# EAGLE board pcb_sebi_tsc (EAGLE 9.7.0)
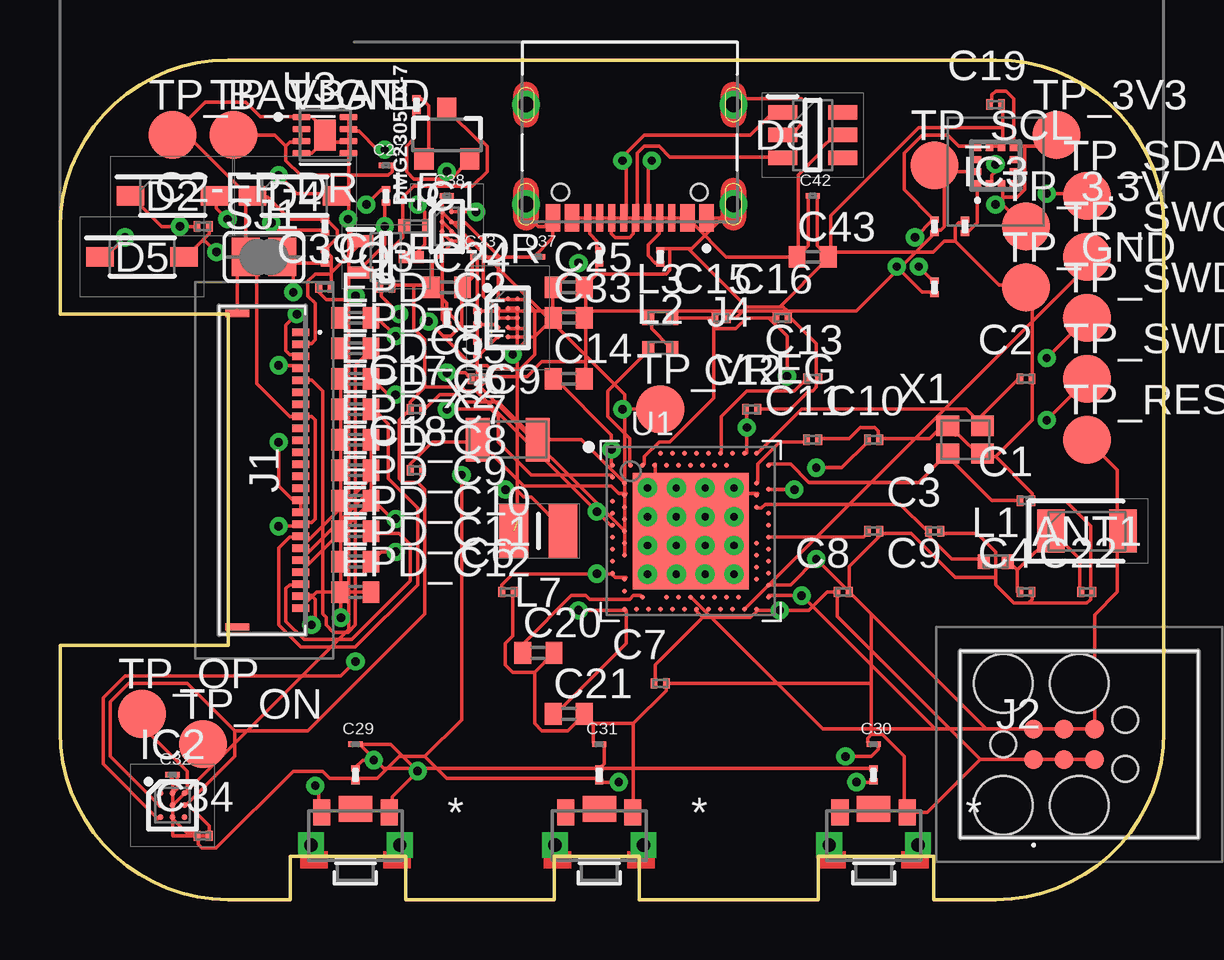
[diagram p0: board, top side]
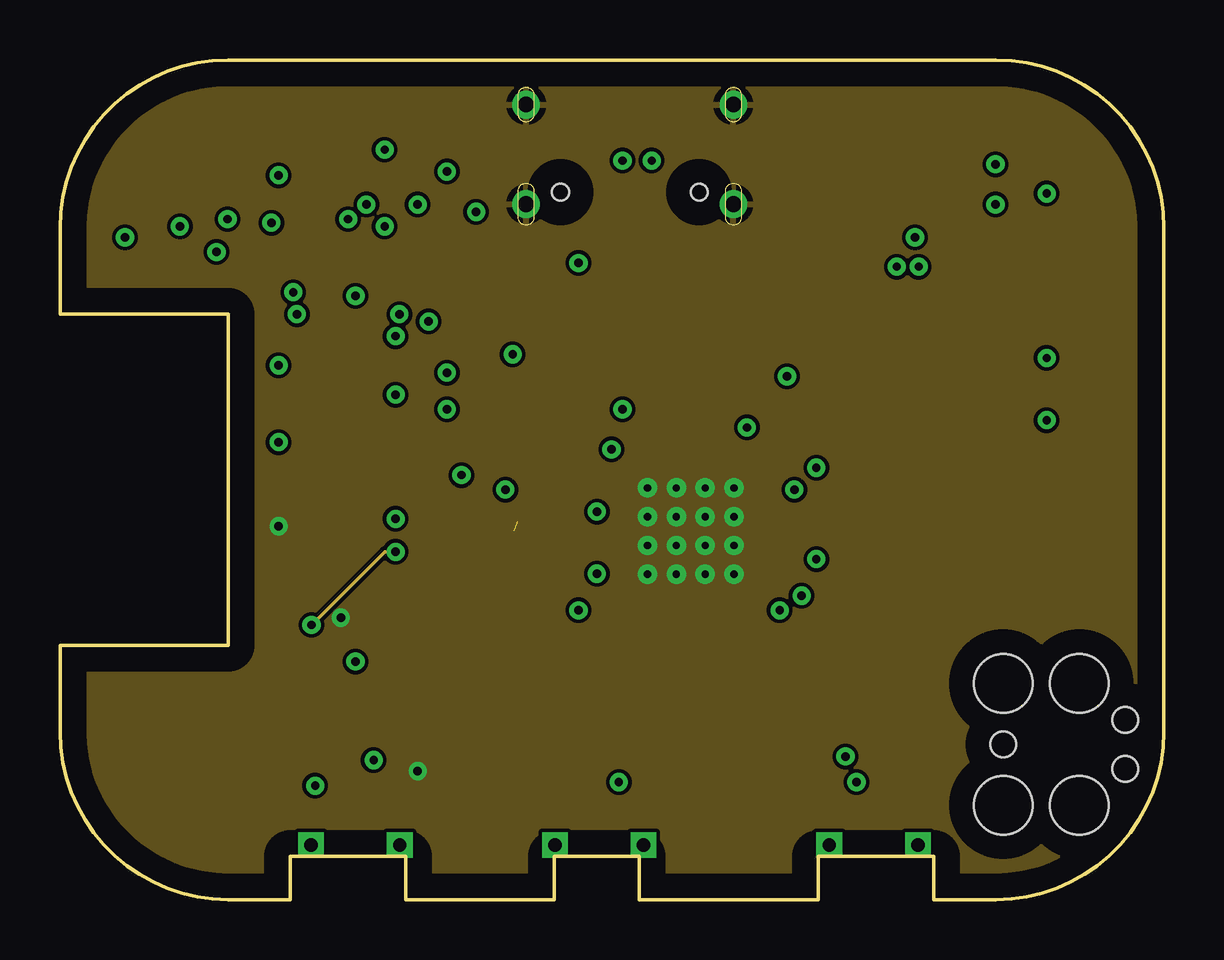
[diagram p1: board, inner layer Route2]
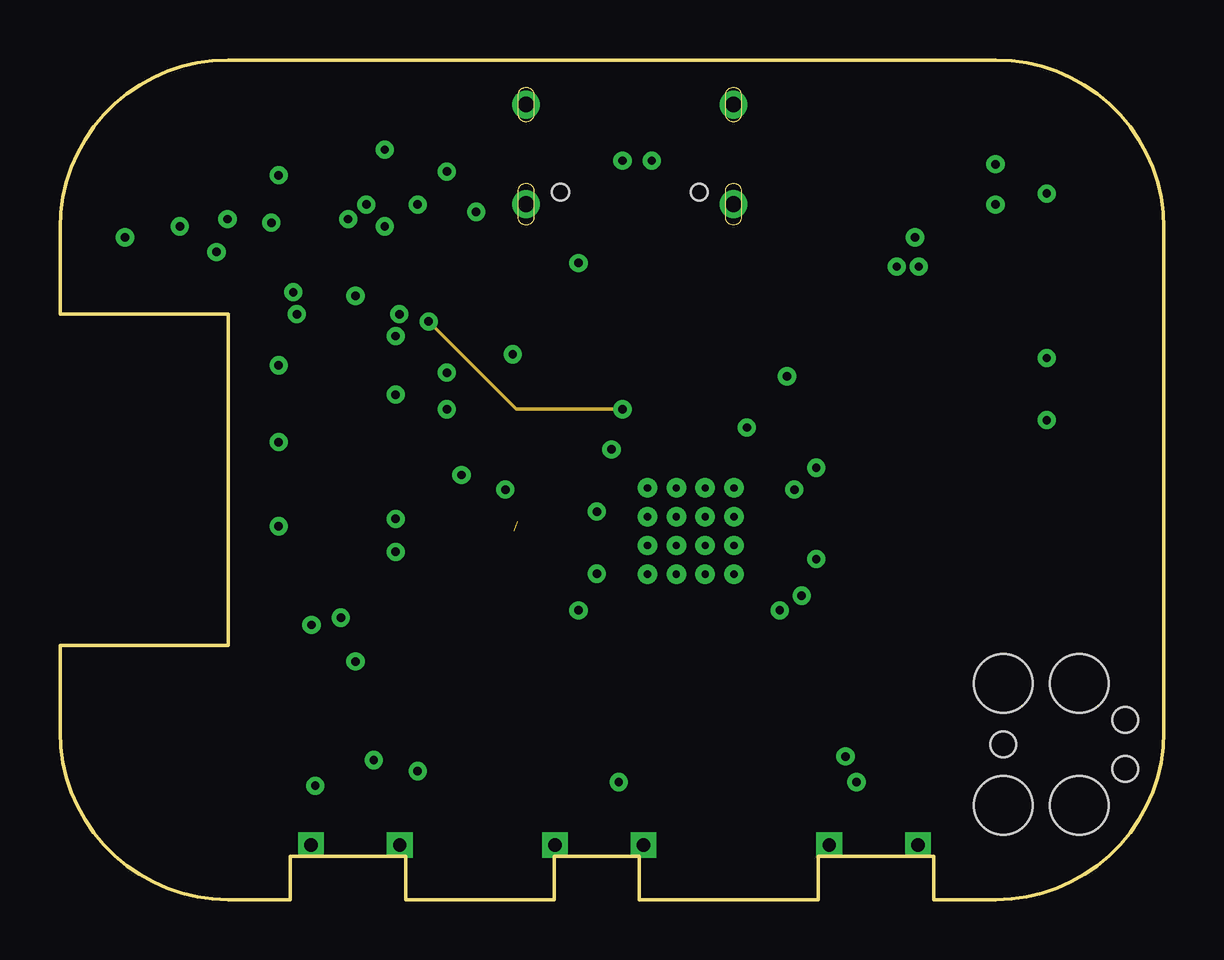
[diagram p2: board, inner layer Route15]
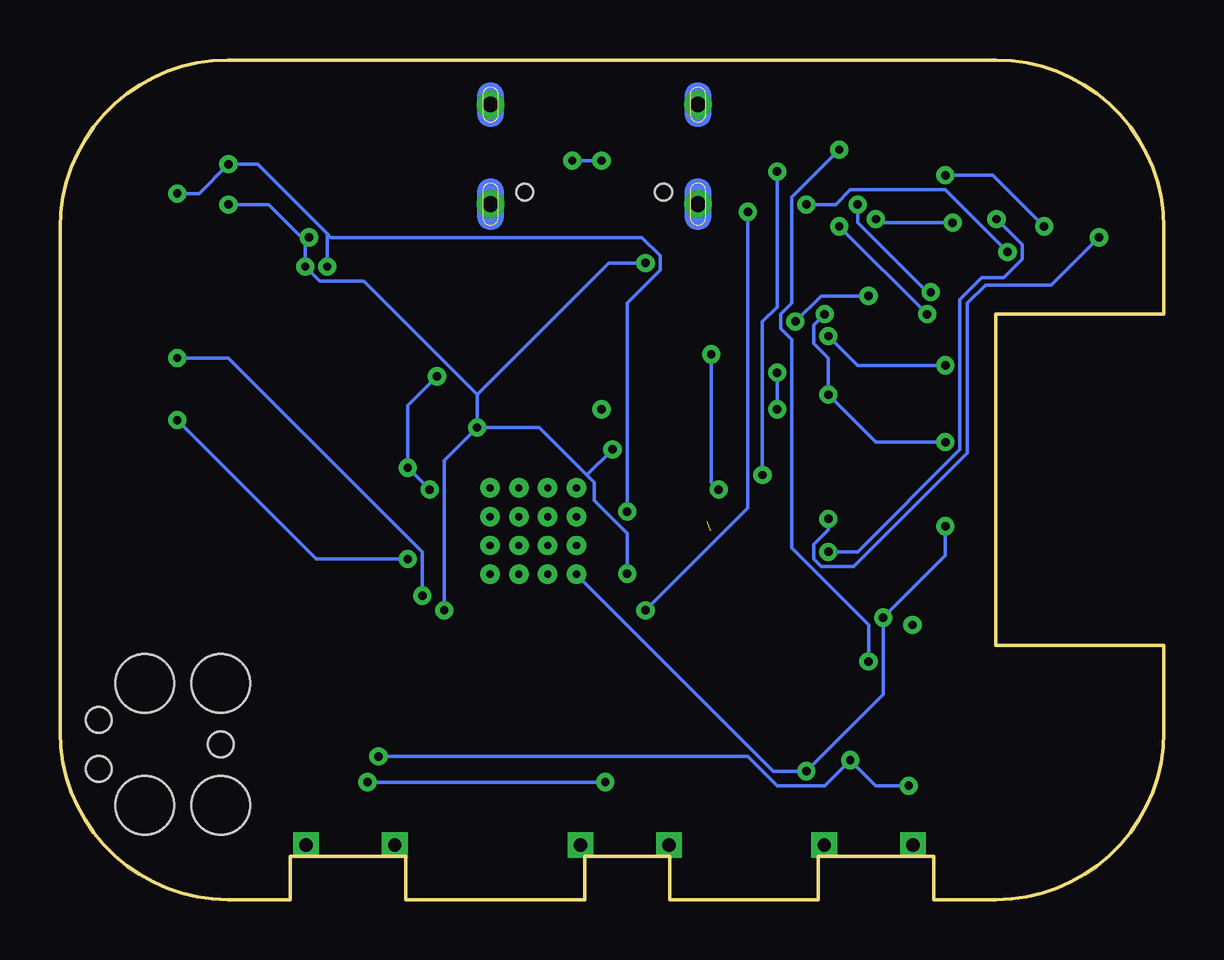
[diagram p3: board, bottom side, seen from below]

Size 46 x 35 mm. Coordinates in mm from the lower left corner, seen from the top.
Outline: 39,0 36.4,0 36.4,1.8 31.6,1.8 31.6,0 24.13,0 24.13,1.8 20.6,1.8 20.6,0 14.4,0 14.4,1.8 9.6,1.8 9.6,0 7,0 arc-90 0,7 0,10.6 7,10.6 7,24.4 0,24.4 0,28 arc-90 7,35 39,35 arc-90 46,28 46,7 arc-90 39,0
Copper layers (1+2*15+16): Top 0.035mm / dielectric 1.5mm / Route2 0.035mm / dielectric 0.15mm / Route15 0.035mm / dielectric 0.2mm / Bottom 0.035mm
Design rules "Fusion Electronics Design Rules *": minimum track width 6mil, minimum drill 0.35mm, track to track 6mil, track to pad 6mil, pad to pad 6mil, via to via 6mil, smd to smd 6mil, copper to edge 40mil, drill to drill 6mil, minimum pad ring 10mil, minimum via ring 8mil, stop-mask expansion 4mil, vias tented up to drill 9999mil, thermal gap 10mil

## Footprints (pad centres in the part's own frame; a part is rotated, then mirrored left to right if it is on the bottom)
2450AT18B100E_ANTC3216X140N = smd 1.15 x 1.8: 1 -1.5,0; 2 1.5,0
NORDIC_NRF_3_RESC0201_L = smd 0.28 x 0.43: 1 -0.255,0; 2 0.255,0
ESP32_C6_LIBRARY_1_ESP32_WROVER_EAGLE-LTSPICE_C0402 = smd 0.7 x 0.9: 1 -0.65,0; 2 0.65,0
GRM011R60J152KE01L_2_CAPC0201X13N = smd 0.22 x 0.23: 1 -0.185,0; 2 0.185,0
ESP32_C6_LIBRARY_5_SOD3716X135N = smd 1.15 x 0.8: 1 -1.75,0; 2 1.75,0
ESP32_C6_LIBRARY_3_SOT95P280X145-6N = smd 1.2 x 0.6: 1 -1.25,0.95; 2 -1.25,0; 3 -1.25,-0.95; 4 1.25,-0.95; 5 1.25,0; 6 1.25,0.95
ESP32_C6_LIBRARY_4_ESP32_C6_LIBRARY_4_ESP32_C6_LIBRARY_4_ESP32_C6_LIBRARY_4_ESP32_WROVER_SPARKFUN-DISCRETESEMI_SOT23-3 = smd 0.8 x 0.9: 1 -0.95,-1; 2 0.95,-1; 3 0,1.1
BQ25180YBGR_BGA8C40P2X4_100X155X50 = smd 0.2 x 0.2: A1 -0.2,0.6; A2 0.2,0.6; B1 -0.2,0.2; B2 0.2,0.2; C1 -0.2,-0.2; C2 0.2,-0.2; D1 -0.2,-0.6; D2 0.2,-0.6
DRV2605YZFR_BGA9C50P3X3_144X144X62 = smd 0.25 x 0.25: A1 -0.5,0.5; A2 0,0.5; A3 0.5,0.5; B1 -0.5,0; B2 0,0; B3 0.5,0; C1 -0.5,-0.5; C2 0,-0.5; C3 0.5,-0.5
BMA423_BMA423 = smd 0.3 x 0.35: 1 -0.75,-0.775; 2 -0.25,-0.775; 3 0.25,-0.775; 4 0.75,-0.775; 7 0.75,0.775; 8 0.25,0.775; 9 -0.25,0.775; 10 -0.75,0.775 | smd 0.35 x 0.3: 5 0.775,-0.25; 6 0.775,0.25; 11 -0.775,0.25; 12 -0.775,-0.25
RT6160AWSC_BGA15C40P3X5_140X230X60 = smd 0.216 x 0.216: A1 -0.4,0.8; A2 0,0.8; A3 0.4,0.8; B1 -0.4,0.4; B2 0,0.4; B3 0.4,0.4; C1 -0.4,0; C2 0,0; C3 0.4,0; D1 -0.4,-0.4; D2 0,-0.4; D3 0.4,-0.4; E1 -0.4,-0.8; E2 0,-0.8; E3 0.4,-0.8
503480-2400_5034802400 = smd 0.3 x 0.7: 1 -5.75,1.525; 2 -5.25,1.525; 3 -4.75,1.525; 4 -4.25,1.525; 5 -3.75,1.525; 6 -3.25,1.525; 7 -2.75,1.525; 8 -2.25,1.525; 9 -1.75,1.525; 10 -1.25,1.525; 11 -0.75,1.525; 12 -0.25,1.525; 13 0.25,1.525; 14 0.75,1.525; 15 1.25,1.525; 16 1.75,1.525; 17 2.25,1.525; 18 2.75,1.525; 19 3.25,1.525; 20 3.75,1.525; 21 4.25,1.525; 22 4.75,1.525; 23 5.25,1.525; 24 5.75,1.525 | smd 0.3 x 1: MP1 -6.54,-1.125; MP2 6.54,-1.125
TC2030-IDC_TC2030IDC = smd 0.783 x 0.783: 1 -0.953,-0.635; 2 -0.953,0.635; 3 0.317,-0.635; 4 0.317,0.635; 5 1.588,-0.635; 6 1.588,0.635 | hole 2.451: -2.223,-2.54; -2.223,2.54; 0.952,-2.54; 0.952,2.54 | hole 1.067: -2.223,0; 2.857,-1.016; 2.857,1.016
KH-TYPE-C-16P_KINGHELM_KH-TYPE-C-16P = smd 0.6 x 1.15: A1_B12 -3.2,4.725; A4_B9 -2.4,4.725; A9_B4 2.4,4.725; A12_B1 3.2,4.725 | smd 0.3 x 1.15: A5 -1.25,4.725; A6 -0.25,4.725; A7 0.25,4.725; A8 1.25,4.725; B5 1.75,4.725; B6 0.75,4.725; B7 -0.75,4.725; B8 -1.75,4.725 | drill 0.65 pad 1.05: SH1 -4.32,0; SH2 4.32,0; SH3 -4.32,4.15; SH4 4.32,4.15 | hole 0.7: -2.89,3.65; 2.89,3.65
NORDIC_NRF_2_RESC0402_L = smd 0.5 x 0.6: 1 -0.5,0; 2 0.5,0
MLP2016SR47MT0S1_INDC2016X100N = smd 1.2 x 2.2: 1 -1.028,0; 2 1.028,0
ESP32_C6_LIBRARY_6_SOT65P210X110-3N = smd 1.05 x 0.5: 1 -1.05,0.65; 2 -1.05,-0.65; 3 1.05,0
ERA-1AEB3401C_0201 = smd 0.35 x 0.25: 1 0,0.275; 2 0,-0.275
CPF0201D7K68C1_0201 = smd 0.35 x 0.25: 1 0,0.275; 2 0,-0.275
ESP32_C6_LIBRARY_7_JUMPER_SJ = smd 1.168 x 1.6: 1 -0.762,0; 2 0.762,0
2025-10-22_07-23-44_LIBRARY_SW_EVP-AKE31A_PAN = smd 0.711 x 1.092: 1 -1.4,-0.972; 2 1.4,-0.972 | drill 0.559 pad 0.914 square: 3 -1.848,0.381; 4 1.848,0.381 | smd 1.397 x 1.092: 5 0,-1.124
HECTOR_WATCH_1_TP20R = smd 2 x 2: TP 0,0
NORDIC_NRF_4_AQFN50P700X700X85_HS-74N = smd 4.85 x 4.85: P$74 0,0 | drill 0.3 pad 0.6: P$75 -1.8,1.8; P$76 -0.6,1.8; P$77 0.6,1.8; P$78 1.8,1.8; P$79 -1.8,0.6; P$80 -0.6,0.6; P$81 0.6,0.6; P$82 1.8,0.6; P$83 -1.8,-0.6; P$84 -0.6,-0.6; P$85 0.6,-0.6; P$86 1.8,-0.6; P$87 -1.8,-1.8; P$88 -0.6,-1.8; P$89 0.6,-1.8; P$90 1.8,-1.8 | smd 0.2 x 0.2: P$A8 -1.25,3.25; P$A10 -0.75,3.25; P$A12 -0.25,3.25; P$A14 0.25,3.25; P$A16 0.75,3.25; P$A18 1.25,3.25; P$A20 1.75,3.25; P$A22 2.25,3.25; P$A23 2.75,3.25; P$AA24 3.25,-2.25; P$AB2 -2.75,-2.5; P$AC5 -2,-2.75; P$AC9 -1,-2.75; P$AC11 -0.5,-2.75; P$AC13 0,-2.75; P$AC15 0.5,-2.75; P$AC17 1,-2.75; P$AC19 1.5,-2.75; P$AC21 2,-2.75; P$AC24 3.25,-2.75; P$AD2 -2.75,-3.25; P$AD4 -2.25,-3.25; P$AD6 -1.75,-3.25; P$AD8 -1.25,-3.25; P$AD10 -0.75,-3.25; P$AD12 -0.25,-3.25; P$AD14 0.25,-3.25; P$AD16 0.75,-3.25; P$AD18 1.25,-3.25; P$AD20 1.75,-3.25; P$AD22 2.25,-3.25; P$AD23 2.75,-3.25; P$B1 -3.25,2.75; P$B3 -2.5,2.75; P$B5 -2,2.75; P$B7 -1.5,2.75; P$B9 -1,2.75; P$B11 -0.5,2.75; P$B13 0,2.75; P$B15 0.5,2.75; P$B17 1,2.75; P$B19 1.5,2.75; P$B24 3.25,2.75; P$C1 -3.25,2.25; P$D2 -2.75,2; P$D23 2.75,2; P$E24 3.25,1.75; P$F2 -2.75,1.5; P$F23 2.75,1.5; P$G1 -3.25,1.25; P$H2 -2.75,1; P$H23 2.75,1; P$J1 -3.25,0.75; P$J24 3.25,0.75; P$K2 -2.75,0.5; P$L1 -3.25,0.25; P$L24 3.25,0.25; P$M2 -2.75,0; P$N1 -3.25,-0.25; P$N24 3.25,-0.25; P$P2 -2.75,-0.5; P$P23 2.75,-0.5; P$R1 -3.25,-0.75; P$R24 3.25,-0.75; P$T2 -2.75,-1; P$T23 2.75,-1; P$U1 -3.25,-1.25; P$U24 3.25,-1.25; P$V23 2.75,-1.5; P$W1 -3.25,-1.75; P$W24 3.25,-1.75; P$Y2 -2.75,-2; P$Y23 2.75,-2
ESP32_C6_LIBRARY_SON50P200X200X80-9N = smd 0.76 x 0.27: 1 -0.985,0.75; 2 -0.985,0.25; 3 -0.985,-0.25; 4 -0.985,-0.75; 5 0.985,-0.75; 6 0.985,-0.25; 7 0.985,0.25; 8 0.985,0.75 | smd 0.9 x 1.3: 9 0,0
NORDIC_NRF_BT-XTAL_2016_N = smd 0.95 x 0.85: 1 -0.725,-0.575; 2 0.725,-0.575; 3 0.725,0.575; 4 -0.725,0.575
NORDIC_NRF_1_XTAL_3215_N = smd 1 x 1.8: 1 -1.25,0; 2 1.25,0

## Placement (x,y rotation side)
ANT1  2450AT18B100E  [2450AT18B100E_ANTC3216X140N]  42.79,15.36 0 top
C1  12pF  [NORDIC_NRF_3_RESC0201_L]  40.25,16.63 0 top
C1-EP-DR  10uF  [NORDIC_NRF_3_RESC0201_L]  13.58,25.52 0 top
C2  12pF  [NORDIC_NRF_3_RESC0201_L]  40.25,21.71 0 top
C2-EP-DR  4.7uF/25V  [NORDIC_NRF_3_RESC0201_L]  5.96,28.06 0 top
C3  1pF  [NORDIC_NRF_3_RESC0201_L]  36.44,15.36 0 top
C4  1pF  [NORDIC_NRF_3_RESC0201_L]  40.25,12.82 0 top
C5  100nF  [NORDIC_NRF_3_RESC0201_L]  17.39,21.71 0 top
C6  4.7µF  [NORDIC_NRF_3_RESC0201_L]  18.66,12.82 0 top
C7  100nF  [NORDIC_NRF_3_RESC0201_L]  25.01,9.01 0 top
C8  100nF  [NORDIC_NRF_3_RESC0201_L]  32.63,12.82 0 top
C9  820pF  [NORDIC_NRF_3_RESC0201_L]  33.9,15.36 0 top
C10  N.C.  [NORDIC_NRF_3_RESC0201_L]  33.9,19.17 0 top
C11  100pF  [NORDIC_NRF_3_RESC0201_L]  31.36,19.17 0 top
C12  100nF  [NORDIC_NRF_3_RESC0201_L]  28.82,20.44 0 top
C13  N.C.  [NORDIC_NRF_3_RESC0201_L]  31.36,21.71 0 top
C14  4.7µF  [ESP32_C6_LIBRARY_1_ESP32_WROVER_EAGLE-LTSPICE_C0402]  21.2,21.71 0 top
C15  1.0µF  [NORDIC_NRF_3_RESC0201_L]  27.55,24.25 0 top
C16  47nF  [NORDIC_NRF_3_RESC0201_L]  30.09,24.25 0 top
C17  12pF  [NORDIC_NRF_3_RESC0201_L]  14.85,20.44 0 top
C18  12pF  [NORDIC_NRF_3_RESC0201_L]  14.85,17.9 0 top
C19  100nF  [NORDIC_NRF_3_RESC0201_L]  38.98,33.14 0 top
C20  4.7µF  [ESP32_C6_LIBRARY_1_ESP32_WROVER_EAGLE-LTSPICE_C0402]  19.93,10.28 0 top
C21  4.7µF  [ESP32_C6_LIBRARY_1_ESP32_WROVER_EAGLE-LTSPICE_C0402]  21.2,7.74 0 top
C22  N.C.  [NORDIC_NRF_3_RESC0201_L]  42.79,12.82 0 top
C23  0.1uF  [GRM011R60J152KE01L_2_CAPC0201X13N]  17.39,26.79 0 top
C24  10uF  [ESP32_C6_LIBRARY_1_ESP32_WROVER_EAGLE-LTSPICE_C0402]  16.12,25.52 0 top
C25  22uF  [ESP32_C6_LIBRARY_1_ESP32_WROVER_EAGLE-LTSPICE_C0402]  21.2,25.52 0 top
C27  0.1uF  [GRM011R60J152KE01L_2_CAPC0201X13N]  13.58,30.6 0 top
C29  1uF  [GRM011R60J152KE01L_2_CAPC0201X13N]  12.31,6.47 0 top
C30  1uF  [GRM011R60J152KE01L_2_CAPC0201X13N]  33.9,6.47 0 top
C31  1uF  [GRM011R60J152KE01L_2_CAPC0201X13N]  22.47,6.47 0 top
C32  1uF  [GRM011R60J152KE01L_2_CAPC0201X13N]  4.69,5.2 0 top
C33  22uF  [ESP32_C6_LIBRARY_1_ESP32_WROVER_EAGLE-LTSPICE_C0402]  21.2,24.25 0 top
C34  0.1uF  [NORDIC_NRF_3_RESC0201_L]  5.96,2.66 0 top
C37  1uF  [GRM011R60J152KE01L_2_CAPC0201X13N]  19.93,26.79 0 top
C38  1uF  [GRM011R60J152KE01L_2_CAPC0201X13N]  16.12,29.33 0 top
C39  10uF  [NORDIC_NRF_3_RESC0201_L]  11.04,25.52 0 top
C42  0.1uF  [GRM011R60J152KE01L_2_CAPC0201X13N]  31.36,29.33 0 top
C43  4.7uF  [ESP32_C6_LIBRARY_1_ESP32_WROVER_EAGLE-LTSPICE_C0402]  31.36,26.79 0 top
D2  ESP32_C6_LIBRARY_5_MBR0530  [ESP32_C6_LIBRARY_5_SOD3716X135N]  4.69,29.33 0 top
D3  USBLC6-2SC6Y  [ESP32_C6_LIBRARY_3_SOT95P280X145-6N]  31.36,31.87 0 top
D4  ESP32_C6_LIBRARY_5_MBR0530  [ESP32_C6_LIBRARY_5_SOD3716X135N]  9.77,29.33 0 top
D5  ESP32_C6_LIBRARY_5_MBR0530  [ESP32_C6_LIBRARY_5_SOD3716X135N]  3.42,26.79 0 top
DMG2305UX-7  20V/4.2A/52mΩ/1.4W  [ESP32_C6_LIBRARY_4_ESP32_C6_LIBRARY_4_ESP32_C6_LIBRARY_4_ESP32_C6_LIBRARY_4_ESP32_WROVER_SPARKFUN-DISCRETESEMI_SOT23-3]  16.12,31.87 0 top
EPD_C1  1uF/50V  [ESP32_C6_LIBRARY_1_ESP32_WROVER_EAGLE-LTSPICE_C0402]  12.31,22.98 0 top
EPD_C2  1uF/50V  [ESP32_C6_LIBRARY_1_ESP32_WROVER_EAGLE-LTSPICE_C0402]  12.31,24.25 0 top
EPD_C5  0.1uF/50V  [ESP32_C6_LIBRARY_1_ESP32_WROVER_EAGLE-LTSPICE_C0402]  12.31,21.71 0 top
EPD_C6  1uF/50V  [ESP32_C6_LIBRARY_1_ESP32_WROVER_EAGLE-LTSPICE_C0402]  12.31,20.44 0 top
EPD_C7  1uF/50V  [ESP32_C6_LIBRARY_1_ESP32_WROVER_EAGLE-LTSPICE_C0402]  12.31,19.17 0 top
EPD_C8  1uF/50V  [ESP32_C6_LIBRARY_1_ESP32_WROVER_EAGLE-LTSPICE_C0402]  12.31,17.9 0 top
EPD_C9  1uF/50V  [ESP32_C6_LIBRARY_1_ESP32_WROVER_EAGLE-LTSPICE_C0402]  12.31,16.63 0 top
EPD_C10  1uF/50V  [ESP32_C6_LIBRARY_1_ESP32_WROVER_EAGLE-LTSPICE_C0402]  12.31,15.36 0 top
EPD_C11  1uF/50V  [ESP32_C6_LIBRARY_1_ESP32_WROVER_EAGLE-LTSPICE_C0402]  12.31,14.09 0 top
EPD_C12  1uF/50V  [ESP32_C6_LIBRARY_1_ESP32_WROVER_EAGLE-LTSPICE_C0402]  12.31,12.82 0 top
IC1  BQ25180YBGR  [BQ25180YBGR_BGA8C40P2X4_100X155X50]  16.12,28.06 0 top
IC2  DRV2605YZFR  [DRV2605YZFR_BGA9C50P3X3_144X144X62]  4.69,3.93 0 top
IC3  BMA421  [BMA423_BMA423]  38.98,30.6 0 top
IC9  RT6160AWSC  [RT6160AWSC_BGA15C40P3X5_140X230X60]  18.66,24.25 0 top
J1  503480-2400  [503480-2400_5034802400]  8.5,17.9 270 top
J2  TC2030-IDC  [TC2030-IDC_TC2030IDC]  41.52,6.47 0 top
J4  KH-TYPE-C-16P  [KH-TYPE-C-16P_KINGHELM_KH-TYPE-C-16P]  23.74,33.14 180 top
L1  3.9nH  [NORDIC_NRF_2_RESC0402_L]  38.98,14.09 0 top
L2  10µH  [NORDIC_NRF_2_RESC0402_L]  25.01,22.98 0 top
L3  15nH  [NORDIC_NRF_2_RESC0402_L]  25.01,24.25 0 top
L5  68uH  [NORDIC_NRF_2_RESC0402_L]  14.85,28.06 0 top
L7  FTC252012SR47MBCA  [MLP2016SR47MT0S1_INDC2016X100N]  19.93,15.36 0 top
Q3  SI1308EDL-T1-GE3  [ESP32_C6_LIBRARY_6_SOT65P210X110-3N]  13.58,26.79 0 top
R1_EP_DR  0.47  [ERA-1AEB3401C_0201]  13.58,29.33 0 top
R1_USB  5K1  [CPF0201D7K68C1_0201]  25.01,26.79 0 top
R2  0  [CPF0201D7K68C1_0201]  17.39,22.98 0 top
R2_EP_DR  10K  [ERA-1AEB3401C_0201]  11.04,28.06 0 top
R2_USB  5K1  [ERA-1AEB3401C_0201]  22.47,26.79 0 top
R3  0  [ERA-1AEB3401C_0201]  37.71,28.06 0 top
R4  0  [CPF0201D7K68C1_0201]  17.39,24.25 0 top
R5  10k  [CPF0201D7K68C1_0201]  12.31,5.2 0 top
R7  10k  [CPF0201D7K68C1_0201]  33.9,5.2 0 top
R8  10k  [CPF0201D7K68C1_0201]  22.47,5.2 0 top
R9  10K  [ERA-1AEB3401C_0201]  16.12,24.25 0 top
R17  3K3  [CPF0201D7K68C1_0201]  36.44,28.06 0 top
R18  3K3  [CPF0201D7K68C1_0201]  36.44,25.52 0 top
R_PWR_EPD  10K  [CPF0201D7K68C1_0201]  14.85,33.14 0 top
R_TYPE_SEL  2.2  [ERA-1AEB3401C_0201]  11.04,26.79 0 top
SJ1  [ESP32_C6_LIBRARY_7_JUMPER_SJ]  8.5,26.79 0 top
SW_DN  2025-10-22_07-23-44_LIBRARY_EVP-AKE31ASW_EVP-AKE31A_PAN  [2025-10-22_07-23-44_LIBRARY_SW_EVP-AKE31A_PAN]  33.9,2.66 180 top
SW_ENT  2025-10-22_07-23-44_LIBRARY_EVP-AKE31ASW_EVP-AKE31A_PAN  [2025-10-22_07-23-44_LIBRARY_SW_EVP-AKE31A_PAN]  22.47,2.66 180 top
SW_UP  2025-10-22_07-23-44_LIBRARY_EVP-AKE31ASW_EVP-AKE31A_PAN  [2025-10-22_07-23-44_LIBRARY_SW_EVP-AKE31A_PAN]  12.31,2.66 180 top
TP_3.3V  HECTOR_WATCH_1_TPTP20R  [HECTOR_WATCH_1_TP20R]  40.25,28.06 0 top
TP_3V3  HECTOR_WATCH_1_TPTP20R  [HECTOR_WATCH_1_TP20R]  41.52,31.87 0 top
TP_BAT_GND  HECTOR_WATCH_1_TPTP20R  [HECTOR_WATCH_1_TP20R]  4.69,31.87 0 top
TP_GND  HECTOR_WATCH_1_TPTP20R  [HECTOR_WATCH_1_TP20R]  40.25,25.52 0 top
TP_ON  HECTOR_WATCH_1_TPTP20R  [HECTOR_WATCH_1_TP20R]  5.96,6.47 0 top
TP_OP  HECTOR_WATCH_1_TPTP20R  [HECTOR_WATCH_1_TP20R]  3.42,7.74 0 top
TP_RESET  HECTOR_WATCH_1_TPTP20R  [HECTOR_WATCH_1_TP20R]  42.79,19.17 0 top
TP_SCL  HECTOR_WATCH_1_TPTP20R  [HECTOR_WATCH_1_TP20R]  36.44,30.6 0 top
TP_SDA  HECTOR_WATCH_1_TPTP20R  [HECTOR_WATCH_1_TP20R]  42.79,29.33 0 top
TP_SWDCLK  HECTOR_WATCH_1_TPTP20R  [HECTOR_WATCH_1_TP20R]  42.79,21.71 0 top
TP_SWDIO  HECTOR_WATCH_1_TPTP20R  [HECTOR_WATCH_1_TP20R]  42.79,24.25 0 top
TP_SWO  HECTOR_WATCH_1_TPTP20R  [HECTOR_WATCH_1_TP20R]  42.79,26.79 0 top
TP_VBAT  HECTOR_WATCH_1_TPTP20R  [HECTOR_WATCH_1_TP20R]  7.23,31.87 0 top
TP_VREG  HECTOR_WATCH_1_TPTP20R  [HECTOR_WATCH_1_TP20R]  25.01,20.44 0 top
U1  NRF52840_QF  [NORDIC_NRF_4_AQFN50P700X700X85_HS-74N]  26.28,15.36 0 top
U3  MAX17048G+T10  [ESP32_C6_LIBRARY_SON50P200X200X80-9N]  11.04,31.87 0 top
X1  32MHz  [NORDIC_NRF_BT-XTAL_2016_N]  37.71,19.17 0 top
X2  32.768kHz  [NORDIC_NRF_1_XTAL_3215_N]  18.66,19.17 0 top

## Library data of the parts
ANT1 = InkTime_v5 (1); ARROW_PART_NUMBER: 2450AT18B100E; ARROW_PRICE-STOCK: https://www.arrow.com/en/products/2450at18b100e/johanson-dielectrics?utm_currency=USD&region=nac; DESCRIPTION: Antennas 2.45GHz ANTENNA; HEIGHT: 1.4mm; MANUFACTURER_NAME: JOHANSON TECHNOLOGY; MANUFACTURER_PART_NUMBER: 2450AT18B100E; MOUSER_PART_NUMBER: 609-2450AT18B100E; MOUSER_PRICE-STOCK: https://www.mouser.co.uk/ProductDetail/Johanson-Technology/2450AT18B100E?qs=yCnrNFeXz%252Bh5MFsFIXGZGA%3D%3D
C1 C1-EP-DR C2 C2-EP-DR C3-C13 C15-C19 C22 C34 C39 L1-L3 L5 R1_EP_DR R1_USB R2 R2_EP_DR R2_USB R3-R5 R7-R9 R17 R18 R_PWR_EPD R_TYPE_SEL SJ1 TP_3.3V TP_3V3 TP_BAT_GND TP_GND TP_ON TP_OP TP_RESET TP_SCL TP_SDA TP_SWDCLK TP_SWDIO TP_SWO TP_VBAT TP_VREG U1 X1 X2 = InkTime_v5 (1)
C14 C20 C21 C24 C25 C33 C43 EPD_C1 EPD_C2 EPD_C5-EPD_C12 = InkTime_v5 (1); SPICEMODEL: NONE; SPICEPREFIX: C
C23 C27 C29-C32 C37 C38 C42 = InkTime_v5 (1); AVAILABILITY: In Stock; CHECK_PRICES: https://www.snapeda.com/parts/GRM011R60J152KE01L/Murata/view-part/?ref=eda; DESCRIPTION: SMD Capacitor X5R(EIA) with Capacitance: 1500pF Tol. 10%. Rated Voltage: 6.3Vdc; MF: Murata; MP: GRM011R60J152KE01L; PACKAGE: 0201 Murata; PRICE: None; SNAPEDA_LINK: https://www.snapeda.com/parts/GRM011R60J152KE01L/Murata/view-part/?ref=snap
D2 D4 D5 = InkTime_v5 (1); AVAILABILITY: In Stock; CHECK_PRICES: https://www.snapeda.com/parts/MBR0530/Onsemi/view-part/?ref=eda; DESCRIPTION: Diode Schottky 30 V 500mA Surface Mount SOD-123; MF: ON Semiconductor; MP: MBR0530; PACKAGE: SOD-123-2 ON Semiconductor; PRICE: None; PURCHASE-URL: https://www.snapeda.com/api/url_track_click_mouser/?unipart_id=179458&manufacturer=ON Semiconductor&part_name=MBR0530&search_term=None; SNAPEDA_LINK: https://www.snapeda.com/parts/MBR0530/Onsemi/view-part/?ref=snap
D3 = InkTime_v5 (1); AVAILABILITY: In Stock; CHECK_PRICES: https://www.snapeda.com/parts/USBLC6-2SC6Y/STMicroelectronics/view-part/?ref=eda; DESCRIPTION: 17V Clamp 5A (8/20µs) Ipp Tvs Diode Surface Mount SOT-23-6; MF: STMicroelectronics; MP: USBLC6-2SC6Y; PACKAGE: SOT-23-6 STMicroelectronics; PRICE: None; SNAPEDA_LINK: https://www.snapeda.com/parts/USBLC6-2SC6Y/STMicroelectronics/view-part/?ref=snap
DMG2305UX-7 = InkTime_v5 (1); PROD_ID: TRAN-14388
IC1 = InkTime_v5 (1); ARROW_PART_NUMBER: BQ25180YBGR; ARROW_PRICE-STOCK: https://www.arrow.com/en/products/bq25180ybgr/texas-instruments?utm_currency=USD&region=nac; DESCRIPTION: Charger IC Lithium Ion/Polymer, Lithium Iron Phosphate 8-DSBGA (1.6x1.1); HEIGHT: 0.5mm; MANUFACTURER_NAME: Texas Instruments; MANUFACTURER_PART_NUMBER: BQ25180YBGR; MOUSER_PART_NUMBER: 595-BQ25180YBGR; MOUSER_PRICE-STOCK: https://www.mouser.co.uk/ProductDetail/Texas-Instruments/BQ25180YBGR?qs=doiCPypUmgEWjAK%252BJAX6Tw%3D%3D
IC2 = InkTime_v5 (1); ARROW_PART_NUMBER: DRV2605YZFR; ARROW_PRICE-STOCK: https://www.arrow.com/en/products/drv2605yzfr/texas-instruments?region=nac; DESCRIPTION: Haptic Driver for ERM/LRA with Built-In Library and Smart Loop Architecture; HEIGHT: 0.625mm; MANUFACTURER_NAME: Texas Instruments; MANUFACTURER_PART_NUMBER: DRV2605YZFR
IC3 = InkTime_v5 (1); ARROW_PART_NUMBER: BMA423; ARROW_PRICE-STOCK: https://www.arrow.com/en/products/bma423/bosch; DESCRIPTION: Accelerometers Triaxial low-g 12bit Acceleration Sensor; HEIGHT: 1mm; MANUFACTURER_NAME: BOSCH; MANUFACTURER_PART_NUMBER: BMA423; MOUSER_PART_NUMBER: 262-BMA423; MOUSER_PRICE-STOCK: https://www.mouser.co.uk/ProductDetail/Bosch-Sensortec/BMA423?qs=HXFqYaX1Q2xC%252BSgeGoX3mg%3D%3D
IC9 = InkTime_v5 (1); DESCRIPTION: Buck-Boost Regulator Positive Output Step-Up/Step-Down I2C DC-DC Controller IC 15-WL-CSP (BSC) (1.4x2.3); HEIGHT: 0.6mm; MANUFACTURER_NAME: RICHTEK; MANUFACTURER_PART_NUMBER: RT6160AWSC; MOUSER_PART_NUMBER: 835-RT6160AWSC; MOUSER_PRICE-STOCK: https://www.mouser.co.uk/ProductDetail/Richtek/RT6160AWSC?qs=amGC7iS6iy%2FLd9PSoixZXQ%3D%3D
J1 = InkTime_v5 (1); DESCRIPTION: FFC & FPC Connectors 0.5mm FPC RA SMT Dual Contact 24Ckt; HEIGHT: 1.87mm; MANUFACTURER_NAME: Molex; MANUFACTURER_PART_NUMBER: 503480-2400; MOUSER_PART_NUMBER: 538-503480-2400; MOUSER_PRICE-STOCK: https://www.mouser.co.uk/ProductDetail/Molex/503480-2400?qs=OAhjpuo3Vu7efIoxFh9AOw%3D%3D
J2 = InkTime_v5 (1); DESCRIPTION: CABLE ADAPTER 6 POS; HEIGHT: 19mm; MANUFACTURER_NAME: Tag Connect; MANUFACTURER_PART_NUMBER: TC2030-IDC
J4 = InkTime_v5 (1); AVAILABILITY: Not in stock; CHECK_PRICES: https://www.snapeda.com/parts/KH-TYPE-C-16P/Kinghelm/view-part/?ref=eda; MF: kinghelm; MP: KH-TYPE-C-16P; PACKAGE: None; PRICE: None; SNAPEDA_LINK: https://www.snapeda.com/parts/KH-TYPE-C-16P/Kinghelm/view-part/?ref=snap
L7 = InkTime_v5 (1); DESCRIPTION: SMD / SMT Inductors (Coils), L=0.47?H, L x W x T :; HEIGHT: 1mm; JLCPCB: https://jlcpcb.com/partdetail/6763488-FTC252012SR47MBCA/C5832368; MANUFACTURER_NAME: TDK; MANUFACTURER_PART_NUMBER: FTC252012SR47MBCA
Q3 = InkTime_v5 (1); AVAILABILITY: In Stock; CHECK_PRICES: https://www.snapeda.com/parts/SI1308EDL-T1-GE3/Vishay+Siliconix/view-part/?ref=eda; DESCRIPTION: Si1308EDL-T1-GE3 N-channel MOSFET Transistor, 1.5 A, 30 V, 3-Pin SC-70 | Siliconix / Vishay SI1308EDL-T1-GE3; MF: Vishay Siliconix; MP: SI1308EDL-T1-GE3; PACKAGE: SOT-323 Vishay Semiconductor; PRICE: None; PURCHASE-URL: https://www.snapeda.com/api/url_track_click_mouser/?unipart_id=274603&manufacturer=Vishay Siliconix&part_name=SI1308EDL-T1-GE3&search_term=None; SNAPEDA_LINK: https://www.snapeda.com/parts/SI1308EDL-T1-GE3/Vishay+Siliconix/view-part/?ref=snap
SW_DN SW_ENT SW_UP = InkTime_v5 (1); COPYRIGHT: Copyright (C) 2025 Ultra Librarian. All rights reserved.; DIGI-KEY_PART_NUMBER_1: P123437TR-ND; DIGI-KEY_PART_NUMBER_2: P123437CT-ND; DIGI-KEY_PART_NUMBER_3: P123437DKR-ND; MANUFACTURER_NAME: Panasonic; MANUFACTURER_PART_NUMBER: EVP-AKE31A
U3 = InkTime_v5 (1); AVAILABILITY: In Stock; CHECK_PRICES: https://www.snapeda.com/parts/MAX17048G+T10/Analog+Devices/view-part/?ref=eda; DESCRIPTION: 3µA 1-Cell/2-Cell Fuel Gauge with ModelGauge; MF: Analog Devices; MP: MAX17048G+T10; PACKAGE: TDFN-8 Maxim; PRICE: None; PURCHASE-URL: https://www.snapeda.com/api/url_track_click_mouser/?unipart_id=329239&manufacturer=Analog Devices&part_name=MAX17048G+T10&search_term=None; SNAPEDA_LINK: https://www.snapeda.com/parts/MAX17048G+T10/Analog+Devices/view-part/?ref=snap

## Nets
3V3/1.7D: C34.1 DMG2305UX-7.2 IC2.C2 R5.2 R7.2 R8.2 R_PWR_EPD.2
3V3/2.4A: C6.1 C7.1 C8.1 C12.1 C14.1 C19.1 C25.1 C33.1 IC3.3 IC3.7 IC3.10 IC9.E2 IC9.E3 J2.1 R17.1 R18.1 TP_3.3V.TP TP_3V3.TP U1.P$A22 U1.P$AD14 U1.P$AD23 U1.P$B1 U1.P$W1 U1.P$Y2
ALERT/1.6C: U3.5
ALERT/2.5C: U1.P$J24
D+/1.5D: D3.4
D+/2.7D: U1.P$AD6
D-/1.5D: D3.6
D-/2.7D: U1.P$AD4
DN: D3.1 J4.A7 J4.B7
DP: D3.3 J4.A6 J4.B6
EPD_3V3: C1-EP-DR.1 DMG2305UX-7.3 EPD_C5.2 J1.15 J1.16 L5.1
EPD_BUSY/1.5D: J1.9
EPD_BUSY/2.2D: U1.P$AD12
EPD_CS/1.4C: J1.12
EPD_CS/2.2D: U1.P$K2
EPD_DC/1.5D: J1.11
EPD_DC/2.2D: U1.P$AD10
EPD_RST/1.5D: J1.10
EPD_RST/2.2D: U1.P$AC11
GDR: J1.2 Q3.1 R2_EP_DR.2
GND: C1-EP-DR.2 C1.2 C2.2 C3.2 C4.2 C5.2 C6.2 C7.2 C8.2 C9.2 C10.2 C11.2 C12.2 C13.2 C14.2 C15.2 C16.2 C17.1 C18.2 C19.2 C20.2 C21.2 C22.2 C23.2 C24.1 C25.2 C29.1 C30.1 C31.1 C32.1 C33.2 C34.2 C37.1 C38.1 C39.2 C42.2 C43.2 D3.2 D4.1 EPD_C5.1 EPD_C6.1 EPD_C7.1 EPD_C8.1 EPD_C9.1 EPD_C10.1 EPD_C11.1 EPD_C12.1 IC1.D2 IC2.B1 IC2.B3 IC3.8 IC3.9 IC9.B1 IC9.C1 IC9.C2 IC9.C3 J1.8 J1.17 J1.MP1 J2.3 J2.5 J4.A1_B12 J4.A12_B1 J4.SH1 J4.SH2 J4.SH3 J4.SH4 R1_USB.1 R2_EP_DR.1 R2_USB.2 R3.1 R9.1 R_TYPE_SEL.1 SJ1.1 SW_DN.1 SW_ENT.1 SW_UP.1 TP_BAT_GND.TP TP_GND.TP U1.P$74 U1.P$75 U1.P$76 U1.P$77 U1.P$78 U1.P$79 U1.P$80 U1.P$81 U1.P$82 U1.P$83 U1.P$84 U1.P$85 U1.P$86 U1.P$87 U1.P$88 U1.P$89 U1.P$90 U1.P$B7 U1.P$F23 U3.1 U3.4 U3.6 U3.9 X1.2 X1.4
HAPTIC_EN/1.4C: IC2.A1
HAPTIC_EN/2.6A: U1.P$U1
IMU_INT1: U1.P$N1
IMU_INT2: U1.P$P2
JJ: C10.1 C15.1 C16.1 L3.2 U1.P$B5 U1.P$E24
LX1: IC9.B2 IC9.B3 L7.1
LX2: IC9.D2 IC9.D3 L7.2
MOSI/1.5B: J1.14
MOSI/2.2D: U1.P$B13
MU_INT1: IC3.5
MU_INT2: IC3.6
N$1: IC1.D1 R9.2
N$2: IC9.D1 R4.2
N$3: IC9.E1 R2.2
N$4: IC3.1 R3.2
N$5: C20.1 U1.P$AC5
N$6: C18.1 U1.P$F2 X2.1
N$7: C17.2 U1.P$D2 X2.2
N$8: C5.1 U1.P$C1
N$9: C9.1 U1.P$N24
N$10: L2.1 U1.P$B3
N$11: L2.2 L3.1
N$12: C3.1 L1.1 U1.P$H23
N$13: ANT1.1 C4.1 C22.1 L1.2
N$14: C11.1 U1.P$D23
N$15: C2.1 U1.P$A23 X1.3
N$16: C1.1 U1.P$B24 X1.1
N$17: C2-EP-DR.2 D5.2 L5.2 Q3.3
N$18: C2-EP-DR.1 D2.1 D4.2
N$20: R1_EP_DR.1 R_TYPE_SEL.2 SJ1.2
N$21: J1.MP2
N$22: C13.1 U1.P$A18
N$23: C32.2 IC2.A2
N$24: EPD_C2.2 J1.4
N$25: EPD_C1.2 J1.5
N$26: EPD_C2.1
N$27: EPD_C1.1
N$28: EPD_C6.2 J1.18
N$29: EPD_C7.2 J1.19
N$30: EPD_C8.2 J1.20
N$31: J4.A5 R1_USB.2
N$32: EPD_C10.2 J1.22
N$33: C31.2 R8.1
N$34: EPD_C12.2 J1.24
N$35: J4.B5 R2_USB.1
N$36: C29.2 R7.1
OUT: IC2.C3
OUT+: IC2.A3 TP_OP.TP
OUT-: TP_ON.TP
P0.04: U1.P$J1
P0.09: U1.P$L24
P0.13/1.5D: C30.2 R5.1 SW_UP.2
P0.13/2.6C: U1.P$AD8
P0.14/1.5D: SW_ENT.2
P0.14/2.7C: U1.P$AC9
P0.19: U1.P$AC15
P0.20: U1.P$AD16
P0.21: U1.P$AC17
P0.22: U1.P$AD18
P0.23: U1.P$AC19
P0.24: U1.P$AD20
P0.25: U1.P$AC21
P0.26: U1.P$G1
P0.27: U1.P$H2
P0.28: U1.P$B11
P0.29: U1.P$A10
P0.30: U1.P$B9
P0.31: U1.P$A8
P1.01/1.6C: DMG2305UX-7.1 R_PWR_EPD.1
P1.01/2.4B: U1.P$Y23
P1.02/1.6C: SW_DN.2
P1.02/2.8C: U1.P$W24
P1.03: U1.P$V23
P1.04: U1.P$U24
P1.05: U1.P$T23
P1.06: U1.P$R24
P1.07: U1.P$P23
P1.09: U1.P$R1
P1.10: U1.P$A20
P1.11: U1.P$B19
P1.12: U1.P$B17
P1.13: U1.P$A16
P1.14: U1.P$B15
P1.15: U1.P$A14
PMIC_INT: IC1.A1 U1.P$T2
PREVGH: D5.1 EPD_C9.2 J1.21
PREVGL: D2.2 EPD_C11.2 J1.23
RESE: J1.3 Q3.2 R1_EP_DR.2
RESET: J2.6 TP_RESET.TP U1.P$AC13
SCK/1.5B: J1.13
SCK/2.2D: U1.P$A12
SCL/1.4C: IC2.C1 U3.7
SCL/2.4C: IC1.B1 IC3.12 R4.1 R17.2 TP_SCL.TP U1.P$M2
SDA/1.4C: IC2.B2 U3.8
SDA/2.4C: IC1.C1 IC3.2 R2.1 R18.2 TP_SDA.TP U1.P$L1
SWDCLK: J2.4 TP_SWDCLK.TP U1.P$AA24
SWDIO: J2.2 TP_SWDIO.TP U1.P$AC24
SWO: TP_SWO.TP U1.P$AD22
VBAT/1.2A: C27.2 TP_VBAT.TP U3.2 U3.3
VBAT/2.5C: C37.2 IC1.C2
VBUS/1.5D: C42.1 C43.1 D3.5 J4.A4_B9 J4.A9_B4
VBUS/2.6D: C21.1 C38.2 IC1.A2 U1.P$AD2
VREG: C23.1 C24.2 C39.1 IC1.B2 IC9.A1 IC9.A2 IC9.A3 TP_VREG.TP

## Tracks (layer width: path | path; a pad name or v marks a point on that pad's centre or on a via)
3V3/1.7D  (via drill 0.35)
  Top 0.152: 16.12,30.04 16.27,30.04 17.03,30.8 DMG2305UX-7.2 | 16.12,30.04 14.75,30.04 14.44,30.35 14.44,31.41 14.75,31.72 14.75,32.78 R_PWR_EPD.2 | IC2.C2 4.69,3.37 5.3,2.76 5.6,2.76 C34.1 5.76,2.61 5.76,2.3 5.91,2.15 6.52,2.15 9.72,5.35 10.94,5.35 11.24,5.05 12.31,5.05 | 15.21,5.96 16.12,5.05 22.37,5.05 R8.2 22.52,4.89 v23.28,4.89 | 15.21,5.96 14.14,5.96 13.22,5.05 12.31,5.05 | 12.31,5.05 R5.2 | v33.19,4.89 33.8,4.89 R7.2 | v16.12,30.35 16.12,30.04 | v16.73,17.7 16.73,7.49 15.21,5.96
  Bottom 0.152: v23.28,4.89 v33.19,4.89 | v16.12,30.35 16.12,24.71 16.73,24.1 v16.73,17.7
3V3/2.4A  (via drill 0.35)
  Top 0.152: 26.79,11.75 26.48,12.06 U1.P$AD14 | 26.79,11.75 28.77,11.75 29.07,12.06 | 26.79,11.75 24.81,9.77 24.81,9.01 C7.1 | 29.07,12.06 v29.99,12.06 31.21,12.06 31.97,12.82 C8.1 32.38,11.81 38.34,5.83 J2.1 | 29.07,12.06 U1.P$AD23 | 39.29,28.97 39.29,29.28 | 39.29,29.28 39.29,29.74 IC3.3 | 39.29,28.97 40.2,28.06 TP_3.3V.TP | 40.2,31.41 40.96,31.41 41.42,31.87 TP_3V3.TP | 40.2,31.41 39.74,31.41 | 39.74,31.41 39.74,33.39 39.44,33.7 38.98,33.7 38.83,33.55 38.83,33.24 C19.1 | 39.74,31.41 IC3.7 | 39.29,29.28 39.89,29.28 40.2,29.58 40.2,31.41 | U1.P$B1 22.98,18.15 v22.98,18.76 22.98,19.37 20.69,21.66 C14.1 | 22.98,13.58 23.13,13.43 23.59,13.43 U1.P$Y2 | 22.98,13.58 v22.37,13.58 18.86,13.58 18.41,13.12 C6.1 | 22.98,13.58 U1.P$W1 | U1.P$A22 28.62,18.61 v28.62,19.68 28.62,20.44 C12.1 | v35.78,26.38 36.39,25.77 R18.1 | 36.39,28.37 v35.63,27.6 | 36.39,28.37 35.17,29.58 35.17,31.11 35.93,31.87 37,31.87 37.46,31.41 38.22,31.41 IC3.10 | 36.39,28.37 R17.1 | v21.61,26.54 20.69,25.62 C25.1 20.54,25.47 C33.1 19.75,23.45 IC9.E3 IC9.E2 | v38.98,28.97 39.29,28.97
  Bottom 0.152: 35.78,27.45 v35.78,26.38 35.17,25.77 33.34,25.77 28.62,21.05 | 28.62,21.05 v28.62,19.68 | v21.61,26.54 23.13,26.54 28.62,21.05 | v22.37,13.58 22.37,15.26 23.74,16.63 23.74,17.39 24.05,17.7 | 24.05,17.7 26.03,19.68 v28.62,19.68 | 24.05,17.7 v22.98,18.76 | v38.98,28.97 37.3,28.97 35.78,27.45 | 35.78,27.45 v35.63,27.6 | v29.99,12.06 29.99,18.31 v28.62,19.68
DN  (via drill 0.35)
  Top 0.152: 23.59,30.8 23.59,31.11 24.35,31.87 28.77,31.87 29.68,32.78 29.99,32.78 D3.1 | 23.59,30.8 23.59,28.52 J4.A7 | v24.65,30.8 24.5,30.65 24.5,28.52 J4.B7 | 23.59,30.8 v23.43,30.8
  Bottom 0.152: v23.43,30.8 v24.65,30.8
DP
  Top 0.152: J4.B6 22.98,28.37 22.98,27.75 23.13,27.6 23.74,27.6 23.89,27.75 23.89,28.37 J4.A6 24.05,28.52 24.05,31.11 24.35,31.41 24.96,31.41 25.42,30.96 29.99,30.96 D3.3
EPD_3V3  (via drill 0.35)
  Top 0.152: 10.02,16.63 10.02,16.17 J1.16 | 10.02,16.63 9.72,16.63 9.11,17.24 v9.11,19.07 | v13.99,21.05 13.68,21.05 13.07,21.66 EPD_C5.2 | 10.02,16.63 J1.15 | 14.29,28.06 14.29,27.6 13.38,26.69 13.38,25.62 C1-EP-DR.1 13.38,25.47 13.38,25.16 v14.14,24.4 | 14.29,28.06 14.29,29.28 14.75,29.74 17.19,29.74 17.8,30.35 17.8,31.41 17.64,31.56 17.49,31.56 16.12,32.94 DMG2305UX-7.3 | 14.29,28.06 L5.1
  Bottom 0.152: v9.11,19.07 12,19.07 v13.99,21.05 13.99,22.57 14.6,23.18 14.6,23.94 v14.14,24.4
GDR  (via drill 0.35)
  Top 0.152: v8.8,28.21 9.11,27.91 10.94,27.91 R2_EP_DR.2 | v12,28.37 12,27.91 12.46,27.45 Q3.1 12.46,27.3 11.24,26.08 10.63,26.08 10.33,25.77 10.33,25.16 10.63,24.86 10.63,23.34 10.48,23.18 10.18,23.18 J1.2
  Bottom 0.152: v8.8,28.21 11.85,28.21 v12,28.37
GND  (via drill 0.35)
  Top 0.152: 7.28,7.03 5.3,9.01 2.86,9.01 2.1,8.25 2.1,5.96 4.08,3.98 IC2.B1 | 7.28,7.03 7.28,5.96 5.3,3.98 | 5.3,3.98 6.21,3.07 6.21,2.76 C34.2 4.69,2.66 4.69,5.02 C32.1 | 5.3,3.98 IC2.B3 | C17.1 14.6,20.75 15.21,21.35 | 15.21,21.35 16.73,21.35 16.88,21.2 17.34,21.2 17.64,21.51 17.64,21.66 C5.2 17.64,21.81 19.47,21.81 20.08,22.42 21.91,22.42 | 14.9,17.39 15.05,17.54 15.05,17.85 C18.2 | 14.9,17.39 14.29,17.39 14.14,17.54 14.14,19.98 C17.1 | C17.1 | R9.1 16.12,24.86 15.51,25.47 C24.1 | 14.75,25.62 15.36,25.62 C24.1 | 14.75,25.62 13.83,25.62 C1-EP-DR.2 | 18.25,24.56 IC9.C1 IC9.C2 IC9.C3 | 16.42,27.45 17.19,27.45 17.64,26.99 17.64,26.84 C23.2 17.64,26.69 17.64,25.16 18.25,24.56 | 16.42,27.45 16.27,27.45 | 16.27,27.45 IC1.D2 | 18.25,24.56 IC9.B1 | 16.42,27.45 15.51,26.54 15.51,25.62 C24.1 | 15.21,21.35 15.21,23.34 14.75,23.79 14.75,25.62 | 7.28,7.03 10.33,7.03 15.21,11.91 15.21,17.09 14.9,17.39 | 19.78,9.47 18.86,9.47 18.56,9.77 18.56,10.69 18.86,10.99 18.86,12.82 C6.2 | 19.78,9.47 20.54,10.23 C20.2 | 22.22,7.33 22.22,6.57 C31.1 | 22.22,7.33 21.91,7.64 C21.2 21.76,7.64 21.15,7.03 20.08,7.03 19.78,7.33 19.78,9.47 | 23.89,7.33 25.26,8.71 C7.2 33.8,9.01 | 22.22,7.33 23.89,7.33 | 23.89,7.33 23.89,3.68 SW_ENT.1 | 33.8,6.88 33.65,6.72 33.65,6.57 C30.1 | 33.8,6.88 34.26,6.88 35.17,5.96 35.17,3.68 SW_DN.1 36.14,3.63 38.34,5.83 J2.3 J2.5 | C8.2 32.88,13.89 34.26,15.26 | 38.98,13.43 38.98,13.12 39.74,12.36 40.35,12.36 | 38.98,13.43 38.98,14.5 38.22,15.26 36.69,15.26 C3.2 | 40.35,12.36 40.5,12.51 C4.2 | 42.94,12.82 42.94,12.51 42.79,12.36 40.35,12.36 | 34.26,15.26 35.48,15.26 37.3,13.43 38.98,13.43 | 34.26,15.26 C9.2
  Top 0.152: 33.8,9.01 33.8,11.91 C8.2 | 33.8,9.01 33.8,6.88 | C8.2 | 37.3,27.45 37.3,28.06 37.46,28.21 37.61,28.21 R3.1 | 37.3,27.45 39.13,25.62 40.2,25.62 TP_GND.TP 40.35,25.47 40.5,25.32 40.5,21.81 C2.2 40.5,21.66 40.5,19.98 38.98,18.46 | C11.2 31.66,19.22 32.88,19.22 33.34,19.68 33.95,19.68 34.1,19.53 34.1,19.22 C10.2 34.26,19.22 36.24,19.22 36.85,19.83 X1.4 37,19.68 37.3,19.37 37.46,19.37 38.37,18.46 X1.2 38.52,18.46 38.98,18.46 | 38.98,18.46 40.5,16.94 C1.2 41.88,16.63 42.94,15.56 42.94,12.82 | C12.2 30.45,20.44 31.21,21.2 31.36,21.2 31.51,21.35 31.51,21.66 C13.2 31.51,21.81 31.51,23.18 30.45,24.25 C16.2 30.29,24.25 30.29,24.56 30.14,24.71 29.99,24.71 | IC3.9 38.83,31.41 39.13,31.41 IC3.8 39.29,31.41 39.29,32.18 | 39.29,32.18 39.29,33.09 C19.2 | C15.2 28.16,24.25 28.62,24.71 | 29.99,24.71 28.62,24.71 | 29.99,24.71 31.97,26.69 C43.2 | 39.29,32.18 35.78,32.18 32.12,28.52 32.12,26.99 | 32.12,26.99 32.12,26.84 C43.2 | 37.3,27.45 36.85,27.45 36.39,26.99 32.12,26.99 | 32.12,26.99 C43.2 | 10.94,31.56 10.48,31.11 10.18,31.11 U3.4 | 10.94,31.87 10.94,31.56 | 10.94,31.87 10.94,32.18 10.48,32.63 10.18,32.63 U3.1 10.02,32.63 8.35,32.63 7.74,33.24 6.06,33.24 4.99,32.18 | 10.94,31.87 U3.9 10.94,31.56 | 10.94,31.56 12,31.56 U3.6 | 7.89,29.28 7.74,29.13 SJ1.1 7.74,26.69 | 7.74,26.69 8.2,26.23 8.2,21.51 9.57,20.13 10.02,20.13 J1.8 10.18,20.13 10.48,20.13 10.63,19.98 10.63,15.87 10.48,15.72 10.18,15.72 J1.17 10.02,15.56 v9.11,15.56 | 7.89,29.28 4.99,32.18 | 4.99,32.18 TP_BAT_GND.TP | 7.89,29.28 D4.1 8.04,29.28 8.65,29.28 9.57,28.37 10.94,28.37 R2_EP_DR.1 11.09,28.37 11.55,27.91 11.55,27.6 11.09,27.15 R_TYPE_SEL.1 11.3,26.81 C39.2
  Top 0.152: 24.5,17.24 24.81,17.54 24.81,18.15 U1.P$B7 | U1.P$F23 29.07,16.94 28.31,16.94 28.16,17.09 U1.P$74 24.5,17.24 | 11.7,12.82 11.7,14.04 EPD_C11.1 11.7,14.19 11.7,15.26 EPD_C10.1 11.7,15.41 11.7,16.63 | 11.7,20.44 11.7,21.66 EPD_C5.1 | 11.7,16.63 11.7,17.85 EPD_C8.1 11.7,18 11.7,19.07 EPD_C7.1 11.7,19.22 11.7,20.44 | 11.7,20.44 EPD_C6.1 | 11.7,16.63 EPD_C9.1 | 22.37,26.08 22.37,26.54 R2_USB.2 | 22.37,26.08 21.91,25.62 C25.2 21.91,25.47 21.91,24.25 | 21.91,24.25 21.91,22.42 | 21.91,22.42 21.91,21.81 C14.2 | 21.91,24.25 C33.2 | 26.18,27.15 26.33,27.15 28.16,28.97 J4.SH3 27.48,28.41 J4.A1_B12 | 26.18,27.15 25.42,27.15 | 25.42,27.15 25.11,27.15 R1_USB.1 | SW_UP.1 13.83,3.68 13.83,4.29 v14.9,5.35 13.78,6.47 C29.1 | D3.2 30.45,31.87 31.05,32.48 31.05,33.24 30.9,33.39 28.31,33.39 28.16,33.24 J4.SH1 | 22.37,26.08 25.26,26.08 25.42,26.23 25.42,27.15 | v11.7,11.75 11.7,12.82 | 11.7,12.82 EPD_C12.1 | 24.5,17.24 U1.P$75 | 26.18,27.15 28.62,24.71 | 42.94,12.82 C22.2 | C42.2 31.55,27.25 C43.2 | J1.MP1 7.38,26.32 7.74,26.69 | C38.1 15.93,27.79 16.27,27.45 | C37.1 20.54,27.59 J4.A12_B1 20.18,28.06 19.93,28.06 19.42,28.57 J4.SH4
  Bottom 0.152: U1.P$87 16.27,5.35 v14.9,5.35 11.7,8.55 v11.7,11.75 9.11,14.34 v9.11,15.56
  pour Route2: -9.2,-3.71 -9.22,-3.73 -10.37,-4.88 54.14,-4.88 54.14,40.68 -9.2,40.68
JJ  (via drill 0.35)
  Top 0.152: v30.6,17.09 29.53,17.09 U1.P$E24 | v31.51,18 32.58,18 33.65,19.07 C10.1 | 27.24,24.25 27.24,23.79 | 27.24,23.79 27.24,20.9 25.42,19.07 24.96,19.07 24.35,18.46 24.35,18.15 U1.P$B5 | 29.53,24.25 28.62,24.25 28.16,23.79 27.24,23.79 | 29.53,24.25 C16.1 | 27.24,24.25 L3.2 | 27.24,24.25 C15.1 | v30.29,21.81 30.29,23.49 29.53,24.25
  Bottom 0.152: v30.6,17.09 v31.51,18 31.51,20.59 v30.29,21.81
LX1  (1 unrouted)
  Top 0.152: IC9.B2 IC9.B3 19.06,15.76
LX2  (via drill 0.35)
  Top 0.152: 19.02,23.79 18.71,23.79 IC9.D2 | 19.02,23.79 19.32,23.79 19.47,23.64 19.47,23.34 v18.86,22.73 | v18.56,17.09 19.02,17.09 19.32,16.78 19.62,16.78 21,15.41 L7.2 | 19.02,23.79 IC9.D3
  Bottom 0.152: v18.86,22.73 18.86,17.39 v18.56,17.09
N$1
  Top 0.152: R9.2 15.92,24.18 IC1.D1
N$2
  Top 0.152: R4.2 18.13,23.97 IC9.D1
N$3
  Top 0.152: IC9.E1 18.25,23.49 17.49,22.73 R2.2
N$4
  Top 0.152: R3.2 37.76,27.91 37.91,27.91 38.22,28.21 38.22,29.74 IC3.1
N$5
  Top 0.152: U1.P$AC5 24.2,12.67 23.89,12.67 23.74,12.51 22.06,12.51 21.91,12.67 21.3,12.67 19.32,10.69 19.32,10.38 C20.1
N$6
  Top 0.152: U1.P$F2 23.59,16.94 23.28,16.94 22.98,17.24 19.32,17.24 17.49,19.07 X2.1 17.34,19.07 15.51,19.07 14.6,18.15 14.6,18 C18.1
N$7
  Top 0.152: C17.2 15.21,20.44 15.81,21.05 16.58,21.05 16.88,20.75 18.25,20.75 19.78,19.22 X2.2 21.72,19.17 U1.P$D2
N$8  (via drill 0.35)
  Top 0.152: v16.12,20.44 17.95,20.44 18.25,20.13 18.25,19.07 19.62,17.7 22.98,17.7 U1.P$C1 | v16.12,21.96 16.88,21.96 17.03,21.81 C5.1
  Bottom 0.152: v16.12,21.96 v16.12,20.44
N$9
  Top 0.152: U1.P$N24 33.49,15.11 33.65,15.26 C9.1
N$10
  Top 0.152: U1.P$B3 23.74,18.15 23.74,19.22 22.83,20.13 22.83,21.2 24.5,22.88 L2.1
N$11
  Top 0.152: L3.1 24.65,24.25 24.65,23.79 25.42,23.03 L2.2
N$12
  Top 0.152: U1.P$H23 29.07,16.32 29.23,16.32 29.38,16.48 35.02,16.48 36.08,15.41 C3.1 36.08,15.26 37.15,14.19 38.37,14.19 L1.1
N$13
  Top 0.152: 39.89,13.73 39.89,12.82 C4.1 | 39.89,13.73 39.59,14.04 L1.2 | 41.42,15.26 42.48,14.19 42.48,12.82 C22.1 | 41.42,15.26 39.89,13.73 | 41.42,15.26 ANT1.1
N$14
  Top 0.152: U1.P$D23 29.07,17.39 29.07,18.15 29.99,19.07 31.05,19.07 C11.1
N$15
  Top 0.152: 38.22,19.98 38.37,19.83 X1.3 38.22,19.98 | 38.22,19.98 37.76,20.44 30.9,20.44 29.07,18.61 U1.P$A23 | 38.22,19.98 39.89,21.66 C2.1
N$16
  Top 0.152: U1.P$B24 29.53,18.15 30.45,18.15 31.21,17.39 35.78,17.39 36.85,18.46 X1.1 37,18.46 38.83,16.63 C1.1
N$17  (via drill 0.35)
  Top 0.152: 15.21,28.06 15.21,27.3 14.75,26.84 Q3.3 | 5.91,27.45 5.3,26.84 D5.2 | 5.91,27.45 6.21,27.75 C2-EP-DR.2 | 15.21,28.06 15.21,28.67 v14.9,28.97 | v6.52,26.99 6.06,27.45 5.91,27.45 | 15.21,28.06 L5.2
  Bottom 0.152: v14.9,28.97 13.68,28.97 13.07,29.58 9.11,29.58 v6.52,26.99
N$18  (via drill 0.35)
  Top 0.152: C2-EP-DR.1 v4.99,28.06 4.23,28.06 3.01,29.28 D2.1 | v9.11,30.19 9.87,29.43 11.4,29.43 D4.2
  Bottom 0.152: v9.11,30.19 7.13,30.19 v4.99,28.06
N$20  (via drill 0.35)
  Top 0.152: 9.72,26.54 9.41,26.54 9.26,26.69 SJ1.2 9.72,26.54 | 9.72,26.54 10.94,26.54 R_TYPE_SEL.2 | v12.77,28.97 13.38,29.58 13.53,29.58 R1_EP_DR.1 | 9.72,26.54 v9.72,25.32
  Bottom 0.152: v12.77,28.97 12.77,28.21 9.87,25.32 v9.72,25.32
N$22
  Top 0.152: U1.P$A18 27.55,18.61 27.55,20.13 28.62,21.2 30.6,21.2 31.05,21.66 C13.1
N$23
  Top 0.152: C32.2 4.88,4.61 IC2.A2
N$24  (via drill 0.35)
  Top 0.152: v9.11,22.27 10.02,22.27 J1.4 | v13.99,23.49 13.22,24.25 EPD_C2.2
  Bottom 0.152: v9.11,22.27 12.77,22.27 v13.99,23.49
N$25
  Top 0.152: J1.5 10.18,21.66 10.48,21.66 10.94,21.2 10.94,11.91 11.09,11.75 11.09,11.45 11.4,11.14 12,11.14 12.31,11.45 12.31,22.27 12.92,22.88 EPD_C1.2
N$28
  Top 0.152: J1.18 10.02,15.11 9.57,15.11 9.11,14.65 9.11,11.45 10.02,10.53 12.31,10.53 14.9,13.12 14.9,16.32 13.68,17.54 13.68,19.83 13.07,20.44 EPD_C6.2
N$29
  Top 0.152: J1.19 12.96,17.59 EPD_C7.2
N$30
  Top 0.152: J1.20 12.96,17.09 EPD_C8.2
N$31
  Top 0.152: R1_USB.2 24.96,26.54 24.81,26.54 24.5,26.84 24.5,27.3 24.96,27.75 24.96,28.37 J4.A5
N$32
  Top 0.152: J1.22 10.02,13.12 9.57,13.12 9.41,12.97 9.41,11.6 10.18,10.84 12.16,10.84 14.6,13.28 14.6,14.8 14.14,15.26 13.07,15.26 EPD_C10.2
N$33
  Top 0.152: C31.2 22.67,6.42 22.67,5.66 22.52,5.5 R8.1
N$34
  Top 0.152: J1.24 10.7,12.82 EPD_C12.2
N$35
  Top 0.152: R2_USB.1 22.37,27.15 22.37,27.45 22.06,27.75 22.06,28.37 J4.B5
N$36
  Top 0.152: R7.1 13.49,5.47 C29.2
OUT+
  Top 0.152: IC2.A3 5.3,4.44 5.3,5.35 3.47,7.18 3.47,7.64 TP_OP.TP
P0.13/1.5D  (via drill 0.35)
  Top 0.152: v32.73,5.96 33.8,5.96 34.1,6.27 34.1,6.42 C30.2 | v13.07,5.81 12.62,5.81 12.31,5.5 R5.1 | v10.63,4.74 10.79,4.59 10.79,3.68 SW_UP.2
  Bottom 0.152: v32.73,5.96 17.34,5.96 16.12,4.74 14.14,4.74 v13.07,5.81 12,4.74 v10.63,4.74
P1.01/1.6C
  Top 0.152: R_PWR_EPD.1 14.9,33.39 15.05,33.39 15.36,33.09 15.36,31.11 15.21,30.96 DMG2305UX-7.1
PMIC_INT
  Top 0.152: IC1.A1 23.53,21.05 U1.P$T2
PREVGH  (via drill 0.35)
  Top 0.152: v13.99,15.87 13.83,15.87 13.07,16.63 EPD_C9.2 12.96,16.59 J1.21 | v2.71,27.6 1.79,26.69 D5.1
  Bottom 0.152: v13.99,15.87 13.99,15.41 14.6,14.8 14.6,14.19 14.29,13.89 12.92,13.89 8.2,18.61 8.2,24.86 7.43,25.62 4.69,25.62 v2.71,27.6
PREVGL  (via drill 0.35)
  Top 0.152: v10.48,11.45 10.63,11.6 10.63,12.51 10.48,12.67 10.18,12.67 J1.23 | v13.99,14.5 13.38,14.5 13.07,14.19 EPD_C11.2 | v6.98,28.37 6.52,28.82 6.52,29.28 D2.2
  Route2 0.152: v10.48,11.45 13.53,14.5 v13.99,14.5
  Bottom 0.152: v6.98,28.37 5.91,27.3 5.91,26.69 6.67,25.93 7.59,25.93 8.5,25.01 8.5,18.76 12.77,14.5 v13.99,14.5
RESE  (via drill 0.35)
  Top 0.152: R1_EP_DR.2 13.53,28.97 v13.53,28.06 13.53,27.3 12.46,26.23 Q3.2 | v9.87,24.4 9.41,23.94 9.41,22.88 9.57,22.73 10.02,22.73 J1.3
  Bottom 0.152: v13.53,28.06 v9.87,24.4
RESET
  Top 0.152: U1.P$AC13 31.78,7.11 J2.6 43.11,11.87 44.06,12.82 44.06,17.9 TP_RESET.TP
SCL/1.4C  (via drill 0.35)
  Top 0.152: v12.31,9.92 11.7,9.31 2.71,9.31 1.79,8.4 1.79,5.66 4.08,3.37 IC2.C1 | v13.53,31.26 13.22,31.26 12.46,32.02 12.16,32.02 U3.7
  Bottom 0.152: v12.31,9.92 12.31,11.45 15.51,14.65 15.51,23.34 15.97,23.79 15.97,24.4 15.51,24.86 15.51,29.28 v13.53,31.26
SCL/2.4C
  Top 0.152: 36.69,30.35 TP_SCL.TP 36.54,30.5 | 36.69,30.35 36.85,30.19 36.85,28.06 36.69,27.91 36.54,27.91 R17.2 33.18,24.53 R4.1 | 36.69,30.35 38.07,30.35 IC3.12 | U1.P$M2 17.39,21.5 R4.1 | IC1.B1 17.39,26.79 R4.1
SDA/1.4C
  Top 0.152: U3.8 12.02,11.26 IC2.B2
SDA/2.4C  (via drill 0.35)
  Top 0.152: v38.98,30.65 38.98,30.35 38.83,30.19 38.83,29.89 IC3.2 | U1.P$L1 22.98,15.56 v22.37,16.17 17.39,21.15 R2.1 15.92,24.72 IC1.C1 | v34.87,26.38 35.93,25.32 36.39,25.32 R18.2 | v41.11,29.43 42.79,29.43 TP_SDA.TP
  Bottom 0.152: v22.37,16.17 22.37,24.86 21,26.23 21,26.84 21.76,27.6 34.71,27.6 34.87,27.75 | 34.87,27.75 37.76,30.65 v38.98,30.65 40.2,29.43 v41.11,29.43 | 34.87,27.75 v34.87,26.38
SWDCLK  (via drill 0.35)
  Top 0.152: v41.11,19.98 42.79,21.66 TP_SWDCLK.TP | U1.P$AA24 29.53,13.12 30.45,13.12 v31.51,14.19 38.6,7.11 J2.4
  Bottom 0.152: v31.51,14.19 35.32,14.19 v41.11,19.98
SWDIO  (via drill 0.35)
  Top 0.152: TP_SWDIO.TP v41.11,22.57 | U1.P$AC24 29.53,12.67 v30.9,12.67 36.46,7.11 J2.2
  Bottom 0.152: v30.9,12.67 30.9,14.5 38.98,22.57 v41.11,22.57
SWO
  Top 0.152: TP_SWO.TP 42.79,26.37 U1.P$AD22
VBAT/1.2A
  Top 0.152: 9.41,31.41 9.41,30.8 10.02,30.19 13.68,30.19 13.83,30.35 13.83,30.5 C27.2 | 9.41,31.41 9.57,31.56 10.02,31.56 U3.3 10.02,31.72 10.02,32.02 U3.2 | TP_VBAT.TP 8.96,31.87 9.41,31.41
VBAT/2.5C
  Top 0.152: C37.2 17.39,26.79 IC1.C2
VBUS/1.5D
  Top 0.152: D3.5 32.27,31.87 31.66,31.26 31.66,31.11 30.75,30.19 30.75,26.84 C43.1 | C43.1 27.77,26.79 26.39,28.17 J4.A4_B9 J4.A9_B4 | C42.1 31.17,27.25 C43.1
VBUS/2.6D  (via drill 0.35)
  Top 0.152: 23.59,12.06 23.59,10.69 20.69,7.79 C21.1 | v17.34,28.67 16.27,28.67 | 23.59,12.06 v21.61,12.06 | 16.27,28.67 IC1.A2 | 23.59,12.06 U1.P$AD2 | C38.2 16.3,28.7 16.27,28.67
  Bottom 0.152: v17.34,28.67 17.34,16.32 18.48,15.18 v21.61,12.06
VREG  (via drill 0.35)
  Top 0.152: 19.02,25.01 18.71,25.01 IC9.A2 18.56,25.01 18.25,25.01 | 18.25,25.01 18.25,26.84 16.88,28.21 16.27,28.21 IC1.B2 | 18.25,25.01 IC9.A1 | C23.1 17.19,26.69 17.19,25.93 16.88,25.62 C24.2 16.73,25.47 16.73,23.94 16.27,23.49 15.97,23.49 | v12.31,25.16 12.16,25.01 11.09,25.01 10.79,25.32 10.79,25.47 C39.1 | 15.97,23.49 v15.36,24.1 | v23.43,20.44 TP_VREG.TP | 19.02,25.01 19.32,25.01 19.78,24.56 19.78,22.73 19.17,22.12 17.95,22.12 17.8,22.27 17.19,22.27 15.97,23.49 | 19.02,25.01 IC9.A3
  Route15 0.152: v23.43,20.44 19.02,20.44 v15.36,24.1
  Bottom 0.152: v12.31,25.16 14.29,25.16 v15.36,24.1